# EAGLE board interstage_B1v2 (EAGLE 9.6.1)
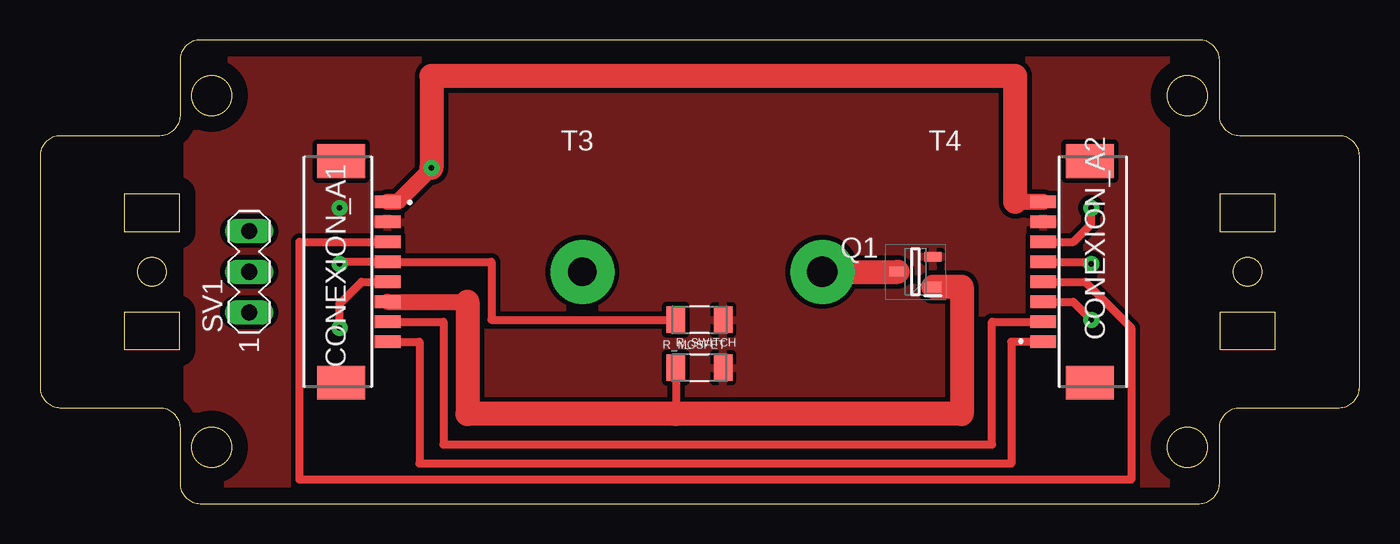
[diagram p0: board, top side]
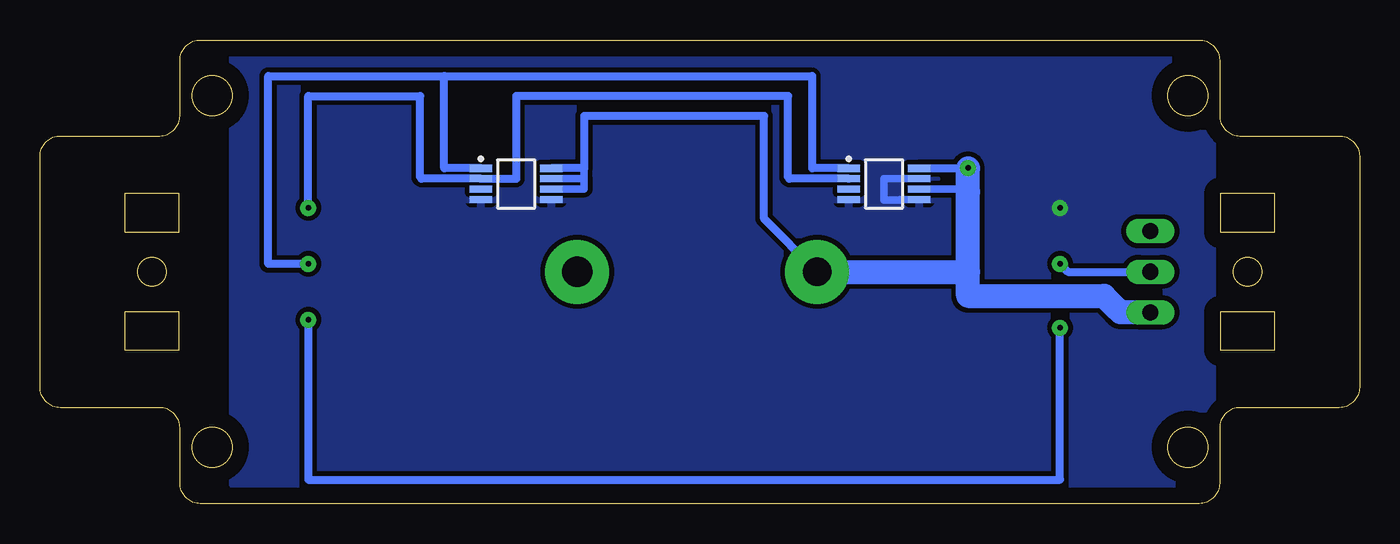
[diagram p1: board, bottom side, seen from below]

Size 82.5 x 29 mm. Coordinates in mm from the lower left corner, seen from the top.
Outline: 5.3,17 5.3,19.4 8.7,19.4 8.7,17 5.3,17
Outline: 73.8,9.6 73.8,12 77.2,12 77.2,9.6 73.8,9.6
Outline: 5.3,12 8.7,12 8.7,9.6 5.3,9.6 5.3,12
Outline: 73.8,17 73.8,19.4 77.2,19.4 77.2,17 73.8,17
Outline: 1.27,6 7.48,6 arc-90 8.75,4.73 8.75,1.27 arc90 10.02,0 72.48,0 arc90 73.75,1.27 73.75,4.73 arc-90 75.02,6 81.23,6 arc90 82.5,7.27 82.5,21.73 arc90 81.23,23 75.02,23 arc-90 73.75,24.27 73.75,27.73 arc90 72.48,29 10.02,29 arc90 8.75,27.73 8.75,24.27 arc-90 7.48,23 1.27,23 arc90 0,21.73 0,7.27 arc90 1.27,6
Outline: circle at 7,14.5 radius 0.9
Outline: circle at 75.5,14.5 radius 0.9
Outline: circle at 10.73,25.52 radius 1.25
Outline: circle at 71.72,3.52 radius 1.25
Outline: circle at 71.72,25.52 radius 1.25
Outline: circle at 10.73,3.52 radius 1.25
Copper layers (1*16): Top 0.035mm / dielectric 1.5mm / Bottom 0.035mm
Design rules "default *": minimum track width 6mil, minimum drill 0.35mm, track to track 0.3mm, track to pad 6mil, pad to pad 6mil, via to via 6mil, smd to smd 6mil, copper to edge 40mil, drill to drill 6mil, minimum pad ring 10mil, minimum via ring 8mil, stop-mask expansion 4mil, vias tented up to drill 0mil, thermal gap 10mil

## Footprints (pad centres in the part's own frame; a part is rotated, then mirrored left to right if it is on the bottom)
53261-0871 = smd 0.8 x 1.6: 1 -4.375,1.004; 2 -3.125,1.004; 3 -1.875,1.004; 4 -0.625,1.004; 5 0.625,1.004; 6 1.875,1.004; 7 3.125,1.004; 8 4.375,1.004 | smd 2.1 x 3: 9 6.925,-1.896; 10 -6.925,-1.896
SOT95P230X110-3N = smd 1.05 x 0.6: 1 -1.1,0.95; 2 -1.1,-0.95; 3 1.1,0
RESC3216X70N = smd 1.16 x 1.68: 1 -1.475,0; 2 1.475,0
MA03-1 = drill 1.016 long: 1 -2.54,0; 2 0,0; 3 2.54,0
SOP65P490X110-8N = smd 1.4 x 0.45: 1 -2.2,0.975; 2 -2.2,0.325; 3 -2.2,-0.325; 4 -2.2,-0.975; 5 2.2,-0.975; 6 2.2,-0.325; 7 2.2,0.325; 8 2.2,0.975

## Placement (x,y rotation side)
CONEXION_A1  53261-0871  [53261-0871]  20.73,14.5 270 top
CONEXION_A2  53261-0871  [53261-0871]  63.73,14.5 90 top
Q1  PMV16XNR  [SOT95P230X110-3N]  54.73,14.5 180 top
R_MOSFET  ERA-8AEB331V  [RESC3216X70N]  41.23,8.5 0 top
R_SWITCH  ERA-8AEB331V  [RESC3216X70N]  41.23,11.5 180 top
SV1  [MA03-1]  13.08,14.5 90 top
T3  MCP9808T-E/MS  [SOP65P490X110-8N]  29.73,20 0 bottom
T4  MCP9808T-E/MS  [SOP65P490X110-8N]  52.73,20 0 bottom

## Library data of the parts
CONEXION_A1 CONEXION_A2 = SamacSys_Parts; DESCRIPTION: Molex PICOBLADE Series, Series Number 53261, 1.25mm Pitch, 8 Way 1 Row Shrouded Right Angle PCB Header, Surface Mount; HEIGHT: mm; MANUFACTURER_NAME: Molex; MANUFACTURER_PART_NUMBER: 53261-0871; MOUSER_PART_NUMBER: 538-53261-0871; MOUSER_PRICE-STOCK: https://www.mouser.co.uk/ProductDetail/Molex/53261-0871?qs=%252B72YyncTwW%252BggfdCJ7Netw%3D%3D
Q1 = SamacSys_Parts; DESCRIPTION: Nexperia PMV16XNR N-channel MOSFET, 8.6 A, 20 V PMV16XN, 3-Pin SOT-23; HEIGHT: 1.1mm; MANUFACTURER_NAME: Nexperia; MANUFACTURER_PART_NUMBER: PMV16XNR; MOUSER_PART_NUMBER: 771-PMV16XNR; MOUSER_PRICE-STOCK: https://www.mouser.com/Search/Refine.aspx?Keyword=771-PMV16XNR
R_MOSFET R_SWITCH = resistor_330_smd; DESCRIPTION: 330 Ohms ±0.1% 0.25W, 1/4W Chip Resistor 1206 (3216 Metric) Automotive AEC-Q200 Thin Film; DIGI-KEY_PART_NUMBER: P330BCCT-ND; MF: Panasonic Electronic; MP: ERA-8AEB331V; PACKAGE: 3216 Panasonic Electronic Components
SV1 = con-lstb; OC_FARNELL: unknown; OC_NEWARK: unknown
T3 T4 = sensorSPEL; DESCRIPTION: Temperature Sensor Digital, Local -40°C ~ 125°C 10 b 8-MSOP; DIGI-KEY_PART_NUMBER: MCP9808T-E/MSCT-ND; MF: Microchip; MP: MCP9808T-E/MS; PACKAGE: MSOP-8 Microchip

## Nets
AIN0: CONEXION_A1.5 CONEXION_A2.3
AIN1: CONEXION_A1.4 R_SWITCH.2 SV1.2
GND: CONEXION_A1.2 CONEXION_A2.7 Q1.2 R_MOSFET.2 R_SWITCH.1 T3.4 T3.5 T3.7 T4.4 T4.5
INT0: CONEXION_A1.7 CONEXION_A2.2
NICROMO: Q1.3
OC1A: CONEXION_A1.3 CONEXION_A2.4
SCL: CONEXION_A2.6 T3.2 T4.2
SDA: CONEXION_A2.5 T3.1 T4.1
T0: CONEXION_A1.8 CONEXION_A2.1
T1: CONEXION_A1.6 Q1.1 R_MOSFET.1
VCC: CONEXION_A1.1 CONEXION_A2.8 SV1.1 T3.6 T3.8 T4.6 T4.7 T4.8

## Tracks (layer width: path | path; a pad name or v marks a point on that pad's centre or on a via)
AIN0  (via drill 0.35 pad 1)
  Top 0.5: v18.73,11 18.73,12.5 20.11,13.88 CONEXION_A1.5 | v65.73,11.5 64.61,12.62 CONEXION_A2.3
  Bottom 0.5: v65.73,11.5 65.73,1.5 18.73,1.5 v18.73,11
AIN1  (via drill 0.35 pad 1)
  Top 0.5: v18.73,15 18.73,15.12 CONEXION_A1.4 28.23,15.12 28.23,11.5 R_SWITCH.2
  Bottom 0.5: v18.73,15 18.23,14.5 SV1.2
GND  (via drill 0.35 pad 1)
  Bottom 0.47: T3.7 29.73,20.32 29.73,19 28.73,19 28.73,19.02 T3.5
  other vias: 18.73,18.5
  pour Top (isolate 0.25): 9.21,28.1 9.21,1.2 70.43,1.2 70.43,28.1
  pour Bottom (isolate 0.25): 9.23,28.1 9.23,1.2 70.43,1.2 70.43,28.1
INT0
  Top 0.5: CONEXION_A1.7 25.23,11.38 25.23,3.7 59.53,3.7 59.53,11.38 CONEXION_A2.2
NICROMO  (via drill 1.9 pad 4)
  Top 1.5: v48.91,14.5 Q1.3
OC1A
  Top 0.5: CONEXION_A1.3 16.23,16.38 16.23,1.5 68.23,1.5 68.23,11 65.36,13.88 CONEXION_A2.4
SCL  (via drill 0.35 pad 1)
  Top 0.5: CONEXION_A2.6 64.61,16.38 65.73,17.5 v65.73,18.5
  Bottom 0.5: T3.2 35.66,20.32 35.73,20.4 35.73,25.5 52.73,25.5 52.73,20.32 T4.2 58.66,20.32 58.73,20.4 58.73,25.5 65.73,25.5 v65.73,18.5
SDA  (via drill 0.35 pad 1)
  Top 0.5: CONEXION_A2.5 65.73,15.12 v65.73,15
  Bottom 0.5: T3.1 34.23,20.98 34.23,26.75 57.23,26.75 | T4.1 57.23,20.98 57.23,26.75 | v65.73,15 68.23,15 68.23,26.75 57.23,26.75
T0
  Top 0.5: CONEXION_A1.8 23.73,10.12 23.73,2.5 60.73,2.5 60.73,10.12 CONEXION_A2.1
T1
  Top 0.5: R_MOSFET.1 39.75,5.6
  Top 1: CONEXION_A1.6 26.73,12.62
  Top 1.5: Q1.1 57.63,13.55 57.63,5.6 39.75,5.6 26.73,5.6 26.73,12.62
VCC  (via drill 0.35 pad 1, 1.8 pad 4)
  Top 1: v24.48,21 22.36,18.88 CONEXION_A1.1 | CONEXION_A2.8 60.98,18.88
  Top 1.5: v24.48,21 24.48,26.75 60.98,26.75 60.98,18.88
  Bottom 0.152: 14.94,11.96 15.11,12.12
  Bottom 0.47: 24.48,19.5 24.66,19.68 T3.6 | T4.6 48.48,19.68 48.48,20.32 | 48.48,20.32 48.48,20.98 | T4.7 48.48,20.32
  Bottom 0.5: T3.8 24.48,20.98 v24.48,21 | T4.8 48.48,20.98 48.48,24.25 37.23,24.25 37.23,17.82 v33.91,14.5
  Bottom 1.5: v33.91,14.5 24.48,14.5 | 24.48,14.5 24.48,13 15.98,13 15.11,12.12 | 24.48,14.5 24.48,19.5 24.48,20.98 | SV1.1 14.94,11.96